# Altium PCB pcb.PcbDoc
Units mm, origin at the board's own origin, x right, y up, seen from the top; angles counter-clockwise.
Board outline 29 x 29 mm, 2 copper layers (Top Layer, Bottom Layer); 22 components, 14 nets, 56 pads, 27 vias.
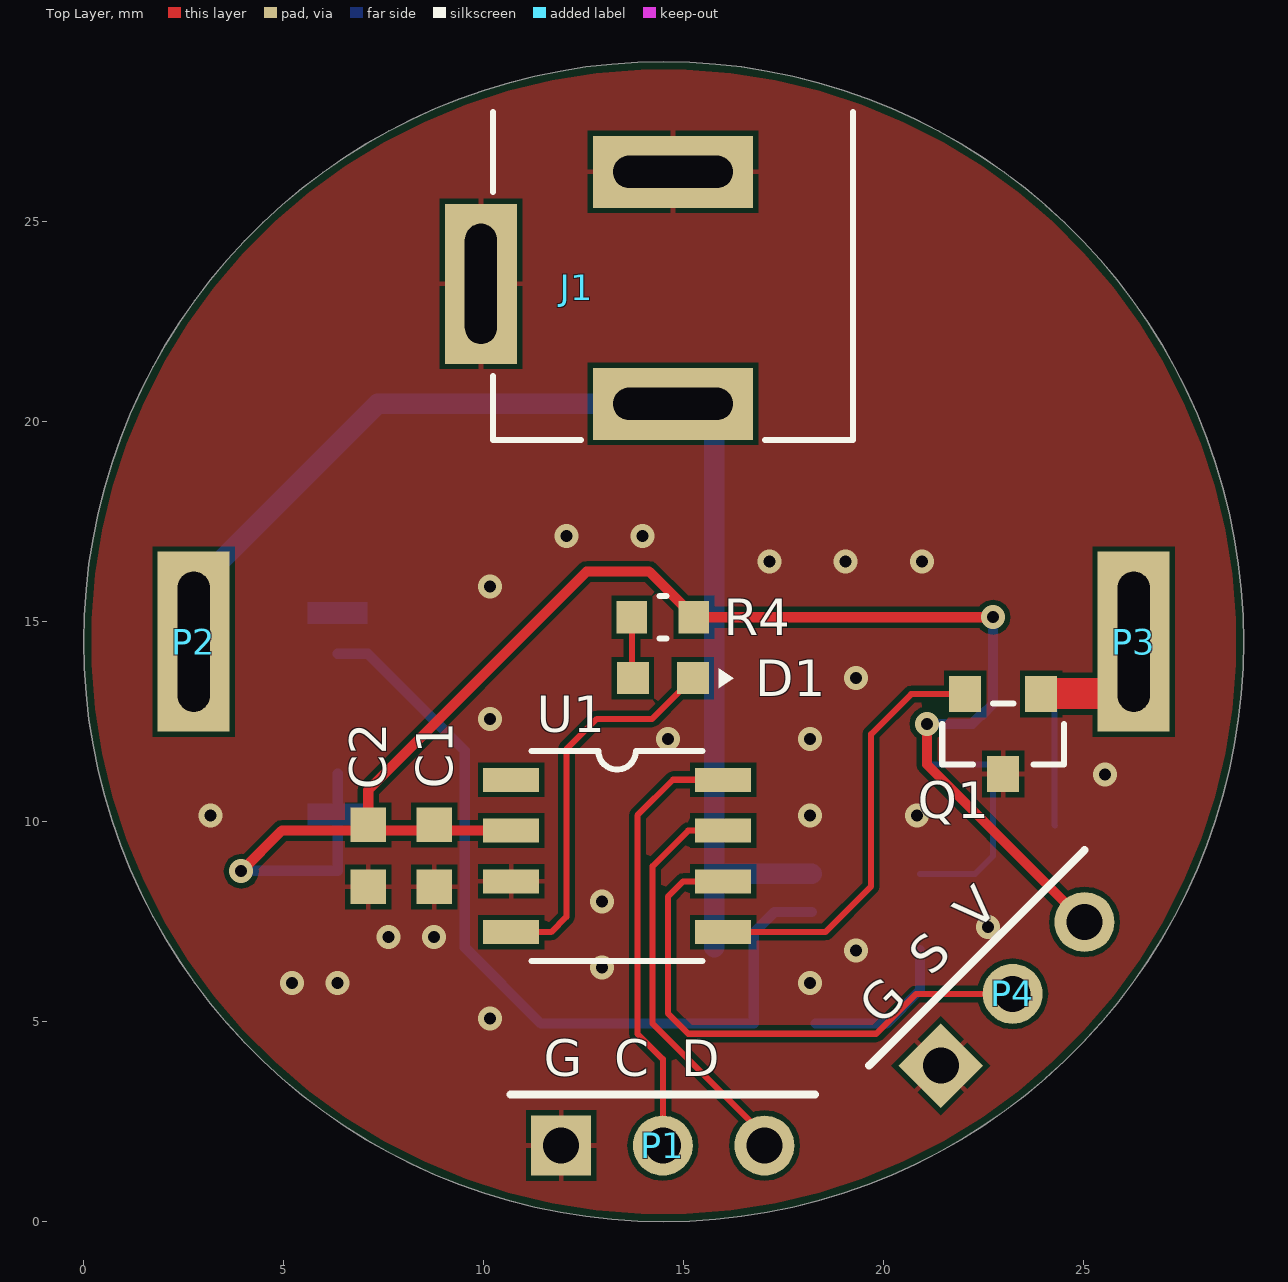
[diagram p0: Top Layer view]
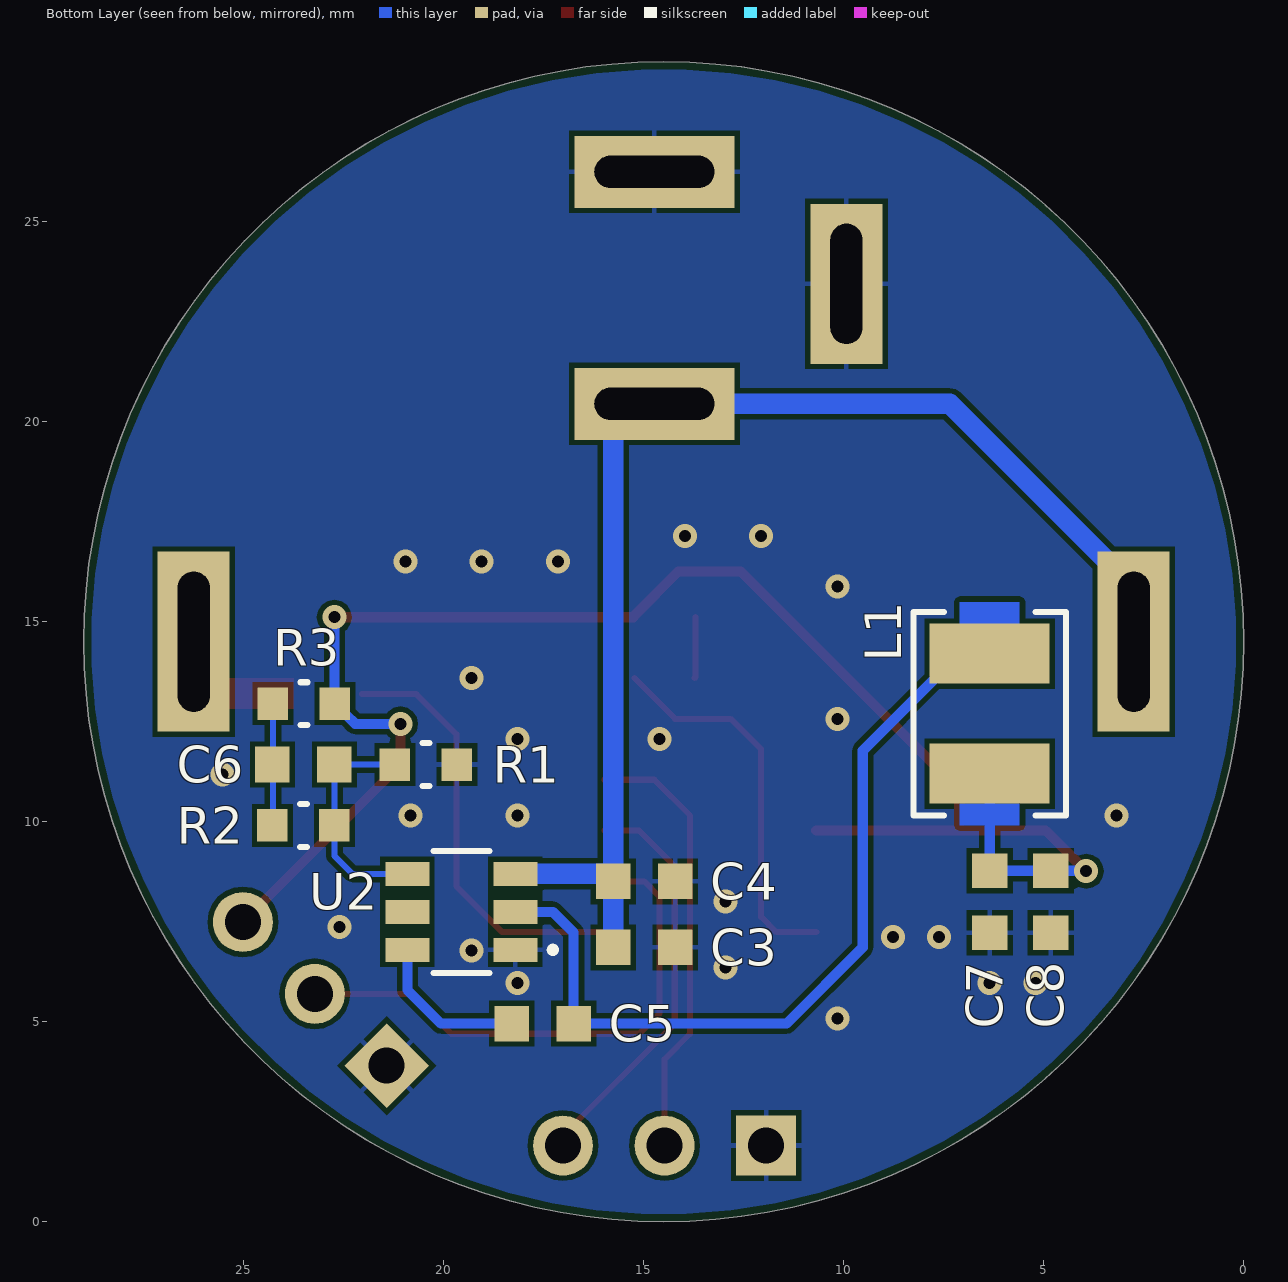
[diagram p1: Bottom Layer view, seen from below]
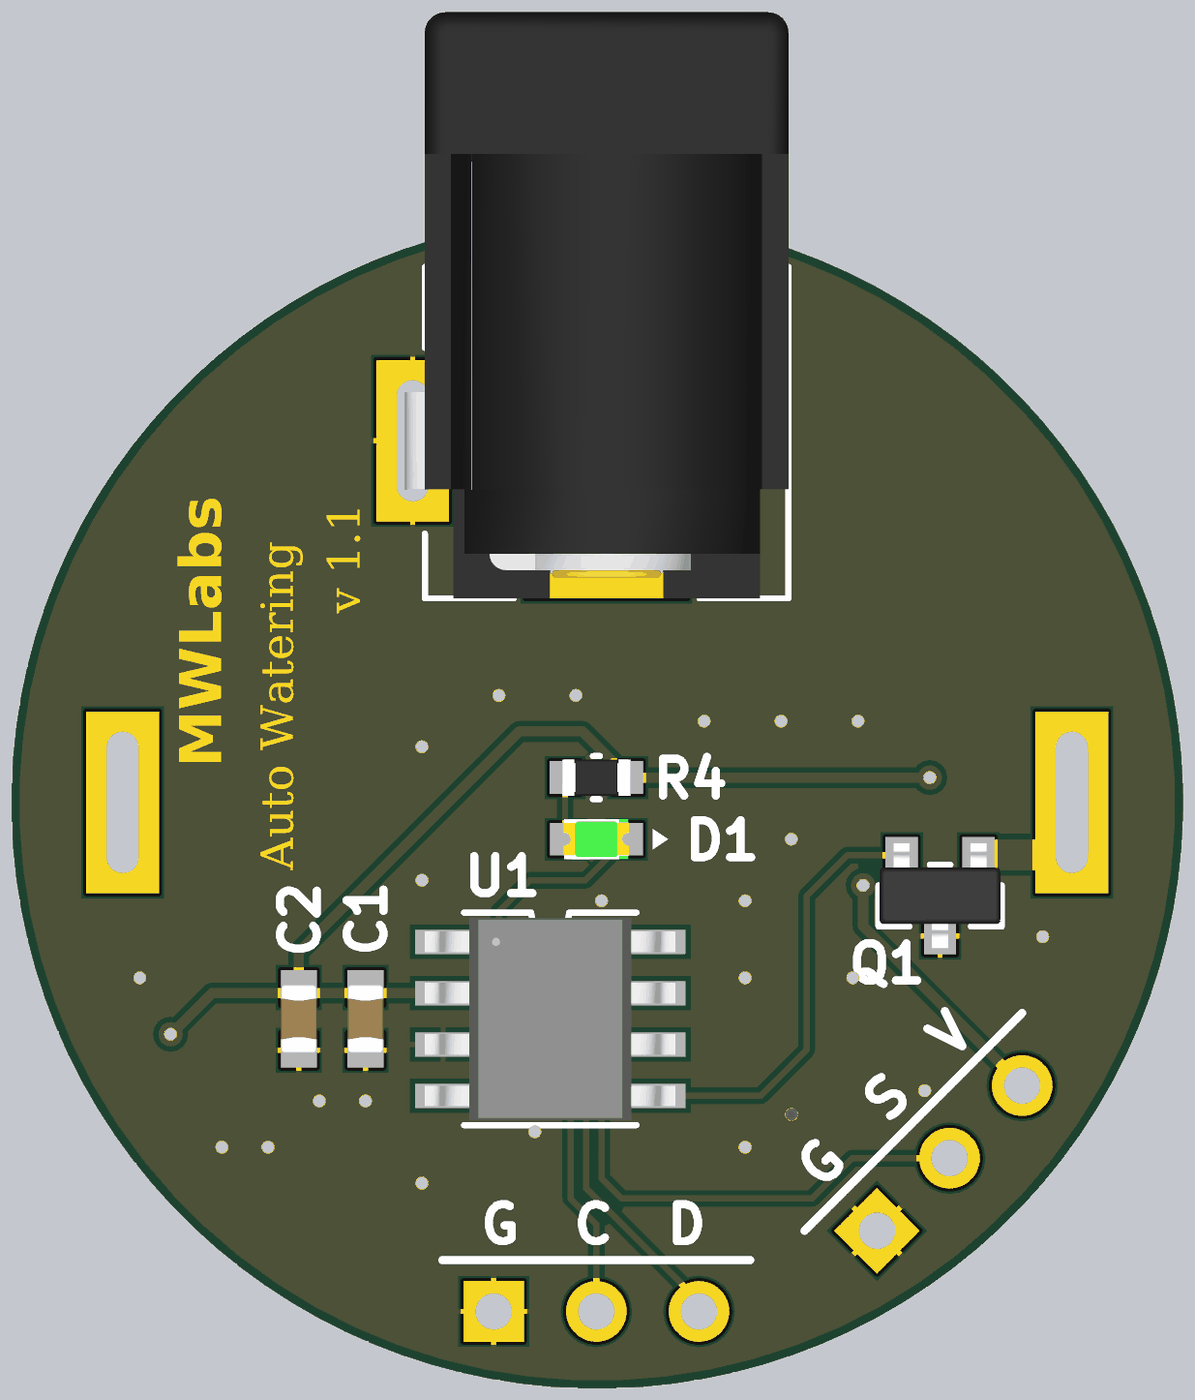
[diagram p2: 3D render of the assembled board from above, using the file's embedded part models]
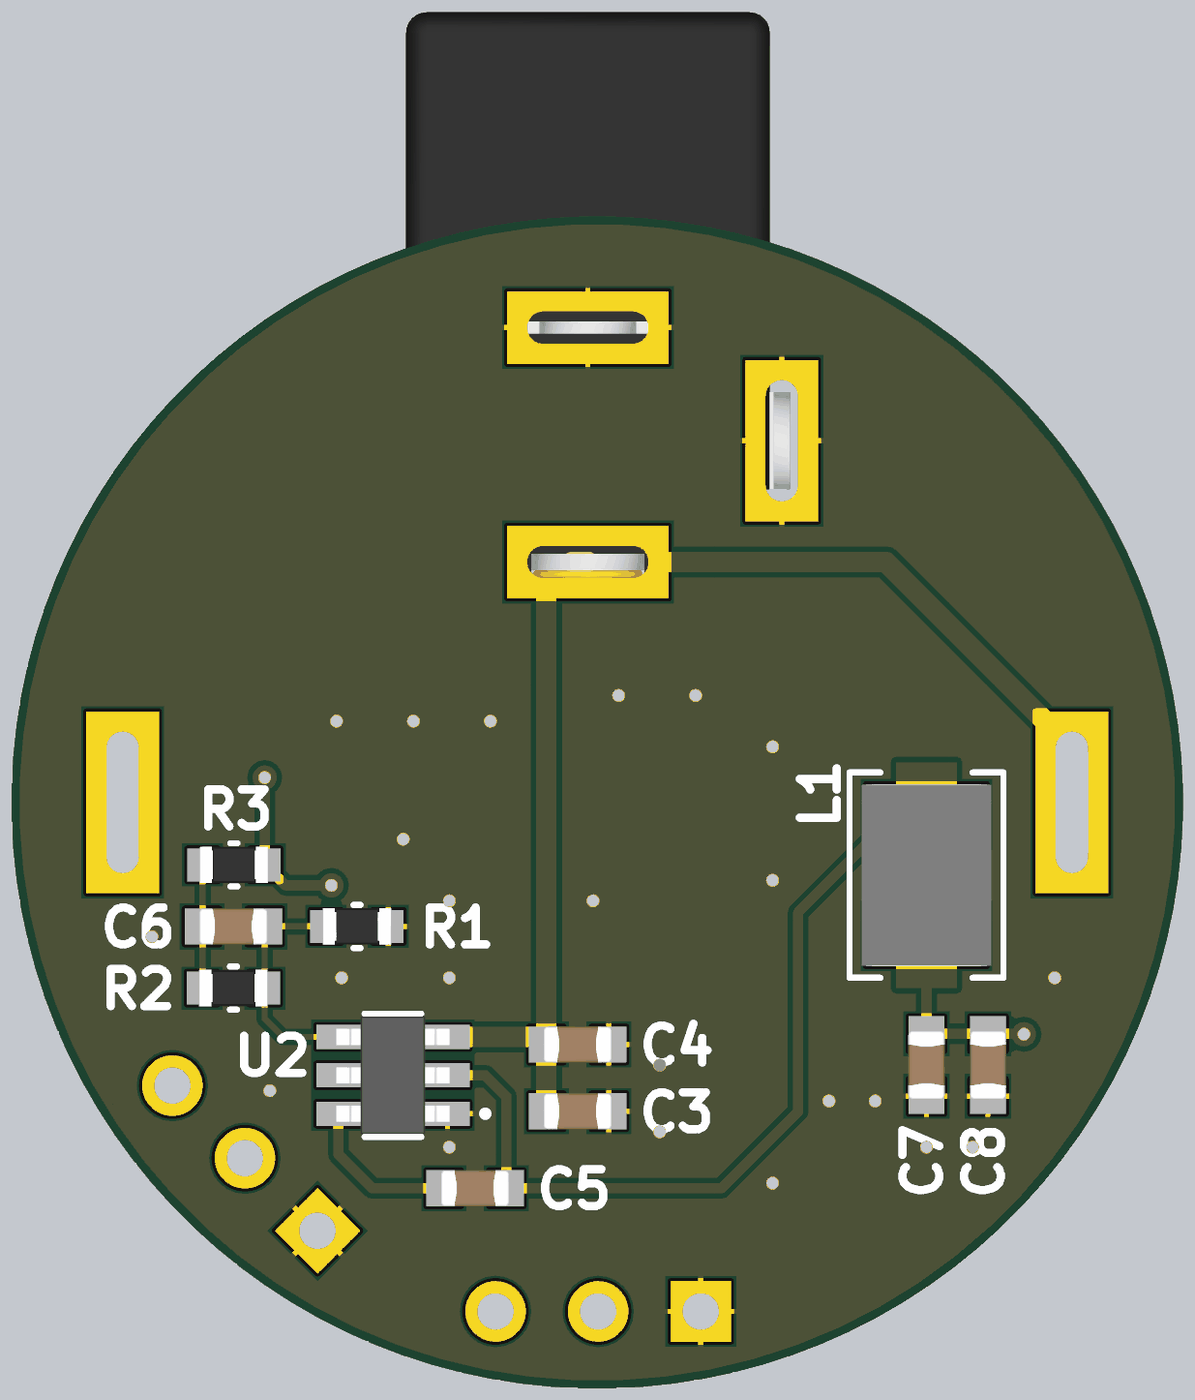
[diagram p3: 3D render of the assembled board from below, using the file's embedded part models]

## Layer stack, top to bottom
Top Solder: solder mask 0.0102, Solder Resist, Dk 3.5
Top Layer: signal copper 0.0356
Dielectric 1: dielectric 0.32, FR-4, Dk 4.8
Bottom Layer: signal copper 0.0356
Bottom Solder: solder mask 0.0102, Solder Resist, Dk 3.5

## Board outline
0,14.5 ccw(c14.5,14.5) 14.5,0 ccw(c14.5,14.5) 29,14.5 ccw(c14.5,14.5) 14.5,29 ccw(c14.5,14.5)

## Design rules (kind name [scope] priority, off if disabled: settings)
BoardOutlineClearance [All] p1: gap=0.2 ignorepadtopadclearanceinfootprint=FALSE
Clearance [All] p1: gap=0.127 ignorepadtopadclearanceinfootprint=FALSE except(0.25: Arc-Hole Track-Hole SMDPad-Hole THPad-Hole Via-Hole Fill-Hole Poly-Hole Region-Hole Text-Hole)
ComponentClearance [All] p1: gap=0.127 collisioncheckmode=3 verticalgap=0.127 showdistances=TRUE
DiffPairsRouting [All] p1: maxlimit=0.254 minlimit=0.127 mostfreqgap=0.127 toplayer_minwidth=0.127 toplayer_maxwidth=25.4 toplayer_prefwidth=0.127 bottomlayer_minwidth=0.127 bottomlayer_maxwidth=25.4 bottomlayer_prefwidth=0.127 maxuncoupledlength=12.7
Height [All] p1: minheight=0 maxheight=1816.048 prefheight=12.7
HoleSize [All] p1: absolutevalues=TRUE maxlimit=6.3 minlimit=0.3 maxpercent=80.000 minpercent=20.000
HoleToHoleClearance [All] p1: gap=0.25 allowstackedmicrovias=FALSE
MinimumAnnularRing [All] p1: minimumring=0.076
MinimumSolderMaskSliver [All] p1: minsoldermaskwidth=0
PlaneClearance [All] p1: clearance=0.127
PlaneConnect PlaneConnectPowerPads [InPadClass('PowerPads')] p1: planeconnectstyle=Direct reliefexpansion=0.508 reliefentries=4 reliefconductorwidth=0.254 reliefairgap=0.254
PlaneConnect [All] p2: pad.planeconnectstyle=Relief pad.reliefexpansion=0.3 pad.reliefentries=4 pad.reliefconductorwidth=0.127 pad.reliefairgap=0.127 via.planeconnectstyle=Direct via.reliefexpansion=0.3 via.reliefentries=4 via.reliefconductorwidth=0.127 via.reliefairgap=0.127
PolygonConnect PolygonConnectPowerPads [All vs (InPadClass('PowerPads'))] p1: connectstyle=Direct reliefconductorwidth=0.254 reliefentries=4 polygonreliefangle="90 Angle" airgapwidth=0.254
PolygonConnect [All] p2: thpad.connectstyle=Relief thpad.reliefconductorwidth=0.127 thpad.reliefentries=4 thpad.polygonreliefangle="90 Angle" thpad.airgapwidth=0.127 smdpad.connectstyle=Relief smdpad.reliefconductorwidth=0.127 smdpad.reliefentries=4 smdpad.polygonreliefangle="90 Angle" smdpad.airgapwidth=0.127 via.connectstyle=Direct via.reliefconductorwidth=0.127 via.reliefentries=4 via.polygonreliefangle="90 Angle" via.airgapwidth=0.127
RoutingVias [All] p1: holewidth=0.3 width=0.6 viastyle="Through Hole" minholewidth=0.3 minwidth=0.6 maxholewidth=0.6 maxwidth=6.6
SilkToSilkClearance [All] p1: silktosilkclearance=0
SilkToSolderMaskClearance [IsPad] p1: minsilkscreentomaskgap=0.127 clearancetoexposedcopper=TRUE
SolderMaskExpansion [All] p1: expansion=0.075 istentingtop=FALSE
Width [All] p1: maxlimit=25.4 minlimit=0.127 preferedwidth=0.127 minimp=50.000000 maximp=50.000000 favimp=50.000000
20 further rules are at their usual default settings.

## Components (designator, comment, footprint, x,y, rotation, side; value= is the part's Value field where it differs from the comment)
C1 "MLCC" CAP_0603 8.763,9.144 r90 top value=100nF
C2 "MLCC" CAP_0603 7.112,9.144 r90 top value=4.7uF
C3 "MLCC" CAP_0603 14.986,6.858 r0 bottom value=10uF
C4 "MLCC" CAP_0603 14.986,8.509 r0 bottom value=100nF
C5 "MLCC" CAP_0603 17.526,4.953 r0 bottom value=100nF
C6 "MLCC" CAP_0603 23.508,11.43 r0 bottom value=47pF
C7 "MLCC" CAP_0603 6.35,8.001 r270 bottom value=22uF
C8 "MLCC" CAP_0603 4.826,8.001 r270 bottom value=22uF
D1 "LED" 0603_GREEN 14.478,13.589 r0 top
J1 "DC Power Jacks" "DC POWER JACK (1)" 14.732,26.797 r180 top
L1 "Inductor" INDWW_4mmSQ 6.35,12.7 r270 bottom value=6.8uH
P1 "SWD_DEBUG" HDR1X3 11.938,1.905 r0 top
P2 "MOTOR_POS" PIN1 2.75,14.5 r90 top
P3 "MOTOR_NEG" PIN1 26.25,14.5 r90 top
P4 "Header 3" HDR1X3 21.427,3.901 r45 top
Q1 "AO3400A" SOT-23/TO-236_318-08 22.987,12.192 r180 top
R1 "RES" RC0603N 20.447,11.43 r0 bottom value=22.1K
R2 "RES" RC0603N 23.508,9.906 r180 bottom value=100K
R3 "RES" RC0603N 23.495,12.954 r180 bottom value=49.9
R4 "RES" RC0603N 14.478,15.113 r0 top value=4.7K
U1 "STM32G031J6M6" SO8N 13.335,9.144 r0 top
U2 "TPS54302" DDC6 19.558,7.747 r0 bottom value=Value

## Footprints (in the part's own frame and the unit in brackets; to place one, negate y for a bottom-side part, rotate by r counter-clockwise, add the part's x,y. Pads: shape width x height; smd on the part's side, far side on the other; paste and mask are expansions set on the pad)
0603_GREEN [mm]
  rect 0.8x0.8 smd: 1(-0.75,0) 2(0.75,0)
  silkscreen extent 1.4,-0.25 1.78,0.25, body extent -0.81,-0.5 0.81,0.5, height 0.88
CAP_0603 [mil]
  rect 34x35 smd: 1(-30.5,0) 2(30.5,0)
  body extent -33,-18 33,18, height 35
"DC POWER JACK (1)" [mm] "THT, 6.4"
  rect 4x1.8 hole 0.8 slot 3 at 0 deg: 1(0,6.35) 2(0,0.55)
  rect 1.8x4 hole 0.8 slot 3 at 90 deg: 3(4.8,3.35)
  silkscreen extent -4.5,-0.95 4.5,7.25, body extent -4.5,-7.25 5,7.25, height 10.75
DDC6 [mm]
  rect 1.1x0.6 smd paste+0 mask+0.07: 1(-1.35,0.95) 2(-1.35,0) 3(-1.35,-0.95) 4(1.35,-0.95) 5(1.35,0) 6(1.35,0.95)
  silkscreen extent -2.36,-1.52 0.7,1.52, body extent -1.4,-1.45 1.4,1.45, height 0.97
HDR1X3 [mm] "Connector; Header; 3 Position"
  rect 1.5x1.5 hole 0.9: 1(0,0)
  round 1.5 hole 0.9: 2(2.54,0) 3(5.08,0)
  silkscreen extent -1.27,1.27 6.35,1.27
INDWW_4mmSQ [mm]
  rect 1.5x3 smd: 1(-1.5,0) 2(1.5,0)
  Top Layer region: -2.794,0.75 -2.24,0.75 -2.24,-0.75 -2.794,-0.75
  Top Layer region: 2.24,0.75 2.794,0.75 2.794,-0.75 2.24,-0.75
  silkscreen extent -2.54,-1.91 2.54,1.91, body extent -2.25,-1.6 2.25,1.6, height 2.6
PIN1 [mm] "Connector; Plug"
  rect 4.5x1.8 hole 0.8 slot 3.5 at 0 deg: 1(0,0)
RC0603N [mil]
  rect 30x32 smd: 1(-30.5,0) 2(30.5,0)
  silkscreen extent -3,-21 3,21, body extent -33,-18 33,18, height 22
SO8N [mm]
  rect 1.4x0.6 smd paste+0 mask+0: 1(-2.65,1.905) 2(-2.65,0.635) 3(-2.65,-0.635) 4(-2.65,-1.905) 5(2.65,-1.905) 6(2.65,-0.635) 7(2.65,0.635) 8(2.65,1.905)
  silkscreen extent -2.13,-2.63 2.13,2.63, body extent -3.1,-2.5 3.1,2.5, height 1.76
SOT-23/TO-236_318-08 [mm]
  rect 0.8x0.9 smd: 1(-0.95,-1) 2(0.95,-1) 3(0,1)
  silkscreen extent -1.52,-0.76 1.52,0.76, body extent -1.5,-1.3 1.5,1.3, height 1.1

## Part data
C1 C2 C3 C4 C5 C6 C7 C8: "Multilayer Ceramic Capacitors", Tolerance=10%, VoltageRatingDC=5V
D1: "LED Emitters", ForwardVoltage=2V
J1: "DC Power Jack Connector with 4 soldering pads & Pegs WR-DC, Male, Right Angled, SMT, 5 A, 24 V", Built_By="Gordon Mak", ComponentLink1Description=Manufacturer, ComponentLink1URL=http://www.we-online.de, ComponentLink2Description=Datasheet, ComponentLink2URL=http://katalog.we-online.de/em/datasheet/6941xx106102.pdf
L1: "Fixed Inductors", MaximumDCCurrent=1A, Impedance=33mOhms
P1: library part "Header 3", "Header, 3-Pin", LatestRevisionDate=17-Jul-2002, LatestRevisionNote="Re-released for DXP Platform.", Publisher="Altium Limited"
P2 P3: library part Plug, "Plug", LatestRevisionDate=17-Jul-2002, LatestRevisionNote="Re-released for DXP Platform.", Publisher="Altium Limited"
P4: "Header, 3-Pin", LatestRevisionDate=17-Jul-2002, LatestRevisionNote="Re-released for DXP Platform.", Publisher="Altium Limited"
Q1: library part MOSFET-N, "N-Channel MOSFET", LatestRevisionDate=17-Jul-2002, LatestRevisionNote="Re-released for DXP Platform.", PackageDescription="TO, Flat Index; 3 In-Line, Axial Leads; Body Dia. 4.6mm; Lead Dia. 0.5 mm (max)", PackageReference=SOT-23, PackageVersion=1995/1996, Published=8-Jun-2000, Publisher="Altium Limited"
R1 R2 R3 R4: "Chip Resistors", PowerRating=0.25W
U1: "Arm® Cortex®-M0+ 32-bit MCU, up to 64 KB Flash, 8 KB RAM, /  2x USART, timers, ADC, comm. I/Fs, 1.7-3.6V", Built_By=EMA_UL_Team, Copyright="Copyright (C) 2018 Accelerated Designs. All rights reserved", Manufacturer_Part_Number=STM32G031J6M6, RefDes=RefDes, SourceLibrary=Updates_to_database_2020-10-19, Type=DEV, Vendor=STMicroelectronics
U2: "TPS54302 4.5-V to 28-V Input, 3-A Output, EMI Friendly / Synchronous Step-Down Converter", Manufacturer="Texas Instruments", Manufacturer_Part_Number=TPS54302DDCR, Built_By="Gordon Mak", Copyright="Copyright (C) 2020 MWLabs. All rights reserved", RefDes=RefDes, Type=DEV

## Via types
v1: diameter 0.6, hole 0.3, Top Layer to Bottom Layer, tented both sides, 27 vias

## Nets (pads, with @x,y where several pads share a name; then routed paths per layer and width w, separated by ;. In a path a pad name is that pad's centre, name@x,y a point inside that pad or via, vN(x,y) a via of type N, cw(c..) or ccw(c..) an arc to the next point about the centre after c; other vN are vias at no path point)
3V3: C1.2 C2.2 C7.1 C8.1 L1.2 P4.3 R3.2 R4.2 U1.2 | length 41.9
  Top Layer w0.254: v1(3.937,8.763) 4.953,9.779 U1.2 ; C2.2 7.112,10.795 12.573,16.256 14.135,16.256 15.253,15.138 R4.2 v1(22.733,15.113) ; v1(21.082,12.446) 21.082,11.43 P4.3
  Bottom Layer w0.254: v1(3.937,8.763) 3.95,8.776 C8.1 C7.1 L1.2 ; v1(21.082,12.446) 22.212,12.446 22.441,12.675 22.466,12.675 22.72,12.929 R3.2 ; R3.2@22.733,12.967 v1(22.733,15.113)
+12: C3.2 C4.2 J1.1 P2.1 U2.3 | length 32
  Bottom Layer w0.508: P2.1 2.75,15.85 7.347,20.447 J1.1 15.115,20.447 15.761,19.801 C4.2@15.761,8.519 ; C3.2 C4.2 C4.2@15.761,8.519 ; U2.3 15.938,8.697 C4.2@15.761,8.519
GND: C1.1 C2.1 C3.1 C4.1 C7.2 C8.2 J1.2 J1.3 P1.1 P4.1 Q1.3 R1.1 U1.3 U2.1
  other v1: 10.16,5.08 5.207,5.969 6.35,5.969 18.161,5.969 12.954,6.35 19.31,6.779 7.62,7.112 8.763,7.112 22.606,7.366 12.954,8.001 3.175,10.16 18.161,10.16 20.828,10.16 25.527,11.176 14.605,12.065 18.161,12.065 10.16,12.573 19.304,13.589 10.16,15.875 17.145,16.51 19.05,16.51 20.955,16.51 12.065,17.145 13.97,17.145
HUM_SENSE: P4.2 U1.6 | length 13.7
  Top Layer w0.152: U1.6 14.986,8.509 14.605,8.128 14.605,5.207 15.113,4.699 19.812,4.699 20.81,5.697 P4.2
LED: D1.2 U1.4 | length 9.6
  Top Layer w0.152: U1.4 11.684,7.239 12.065,7.62 12.065,11.811 12.827,12.573 14.212,12.573 D1.2
MOTOR_CTRL: Q1.2 U1.5 | length 10.7
  Top Layer w0.152: U1.5 18.542,7.239 19.685,8.382 19.685,12.192 20.685,13.192 Q1.2
NetC5_1: C5.1 L1.1 U2.2 | length 21.1
  Bottom Layer w0.254: L1.1 7.1,14.2 9.525,11.775 9.525,6.858 11.43,4.953 C5.1 16.751,7.226 17.272,7.747 U2.2
NetC5_2: C5.2 U2.6 | length 4
  Bottom Layer w0.254: C5.2 20.066,4.953 20.908,5.795 U2.6
NetC6_1: C6.1 R1.2 R2.2 U2.4 | length 5.8
  Bottom Layer w0.152: U2.4 22.286,8.697 22.733,9.144 R2.2 C6.1 R1.2
NetC6_2: C6.2 R2.1 R3.1 | length 3.1
  Bottom Layer w0.152: R3.1 24.27,9.919 R2.1
NetD1_1: D1.1 R4.1 | length 1.5
  Top Layer w0.152: R4.1 13.703,13.614 D1.1
NetP3_1: P3.1 Q1.1
SWCLK: P1.2 U1.8 | length 11
  Top Layer w0.152: P1.2 14.478,4.064 13.843,4.699 13.843,10.16 14.732,11.049 U1.8
SWDIO: P1.3 U1.7 | length 10.3
  Top Layer w0.152: U1.7 15.113,9.779 14.224,8.89 14.224,4.953 17.018,2.159 P1.3
pads on no net: U1.1 U2.5

## Polygon pours and split planes (outlines as drawn)
GND on Top Layer "GND_L01_P000" (solid, remove dead copper, pour order 0): 0,14.5 ccw(c14.5,14.5) 14.5,0 ccw(c14.5,14.5) 29,14.5 ccw(c14.5,14.5) 14.5,29 ccw(c14.5,14.5)
GND on Bottom Layer "GND_L02_P001" (solid, remove dead copper, pour order 1): 0,14.5 ccw(c14.5,14.5) 14.5,0 ccw(c14.5,14.5) 29,14.5 ccw(c14.5,14.5) 14.5,29 ccw(c14.5,14.5)

## Other copper
Top Layer:
  rectangle net NetP3_1: 23.749,12.818 25.372,13.589

## Silkscreen, mask and mechanical layers (free items; w line width, h text height)
Top Overlay:
  text "G  S  V" at 19.939,4.859 h0.91 r45
  text "G  C  D" at 11.506,3.632 h0.91
Top Solder:
  text "v 1.1" at 8.619,19.177 h1.57 r90
  text "MWLabs" at 5.184,15.367 h2.03 r90
  text "Auto Watering" at 6.965,12.827 h1.57 r90
Mechanical 1:
  circle w0.1: c14.5,14.5 r14.5
Mechanical 13:
  circle w0.025: c14.5,14.5 r5